# Altium PCB PCB1.PcbDoc (part 3 of 3)
Units mm, origin at the board's own origin, x right, y up, seen from the top; angles counter-clockwise.
Board outline 200 x 55 mm, 4 copper layers (Top Layer, Power Layer, GND Layer, Bottom Layer), stack 1.714 mm thick; 398 components, 267 nets, 1326 pads, 588 vias.
Unrouted connection lines stored in the file: 81.
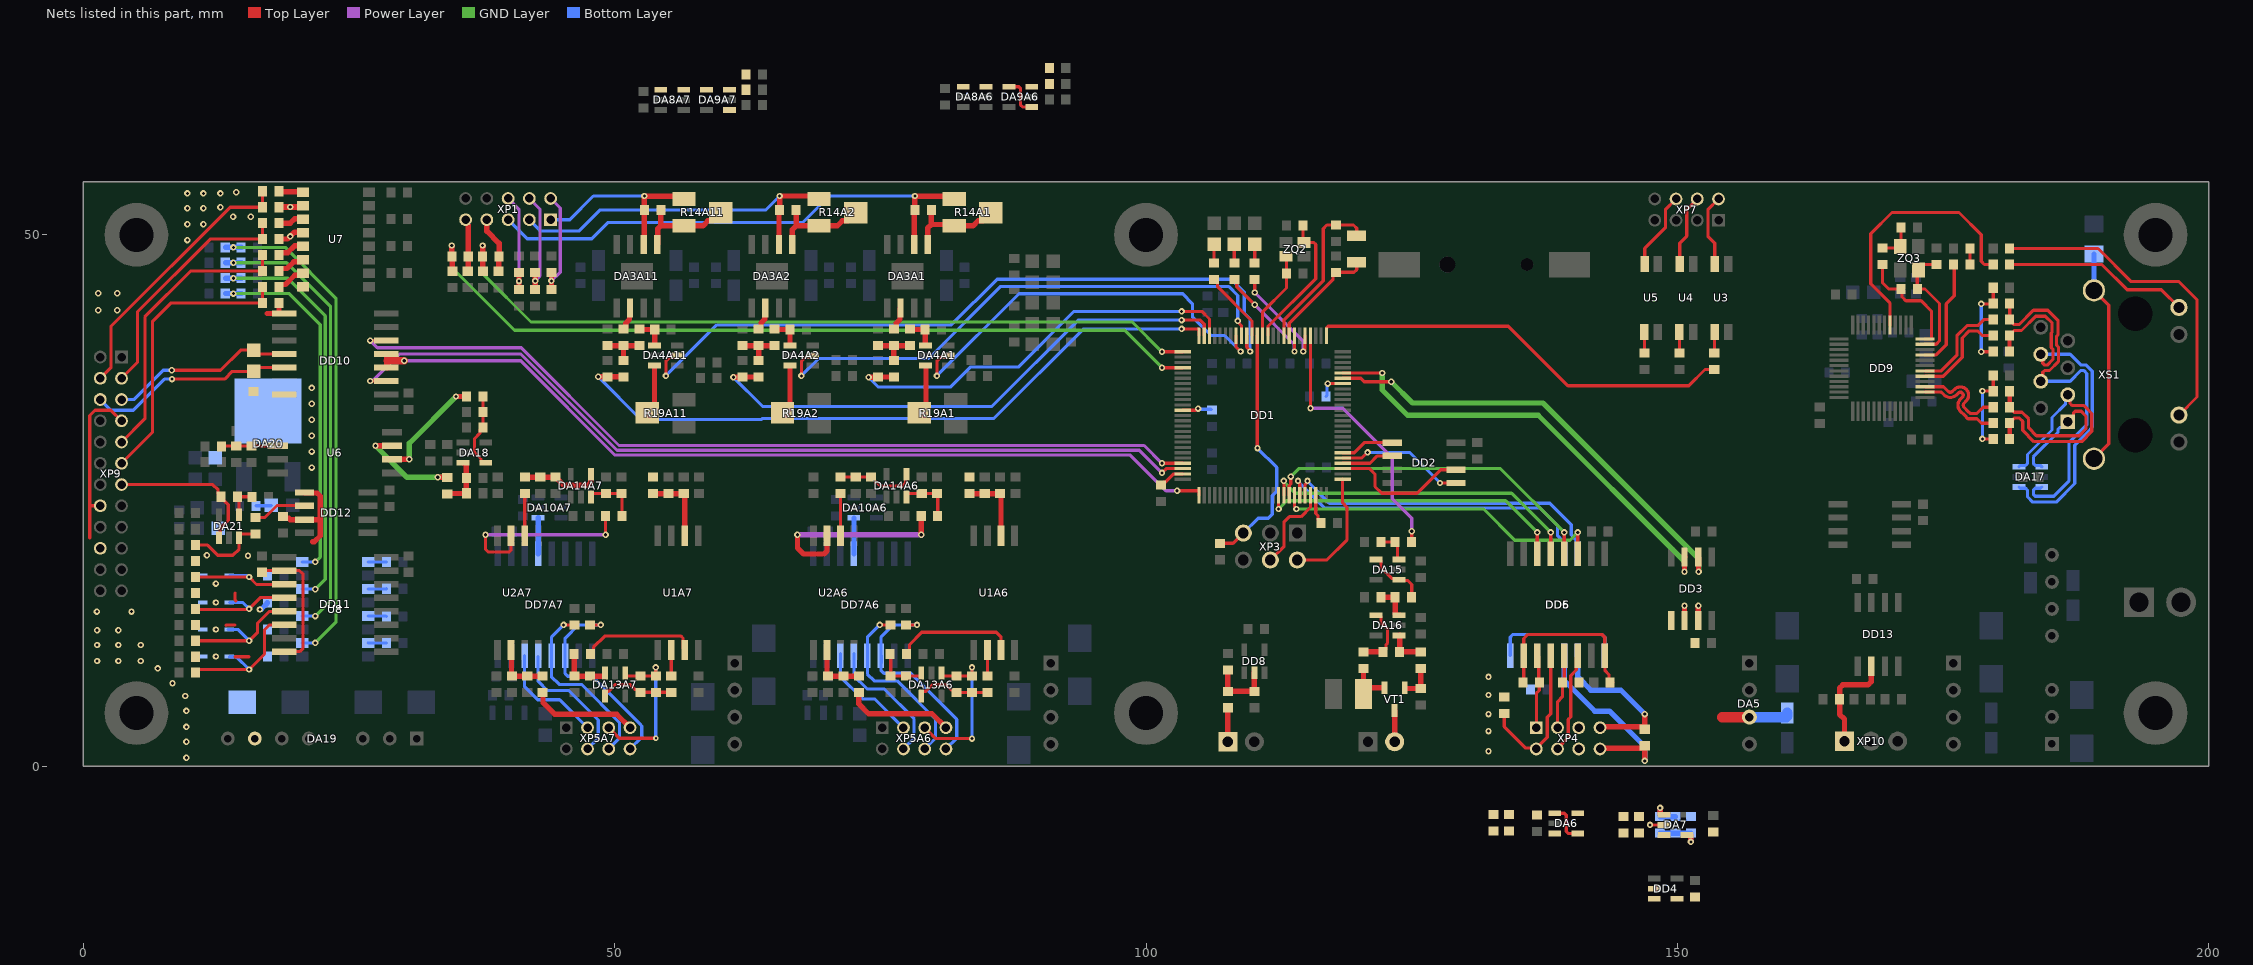
[diagram p5: the nets of this part, all layers, seen from the top]

## Via types
v1: diameter 0.6, hole 0.3, Top Layer to Bottom Layer, tented both sides, 547 vias
v2: diameter 0.6, hole 0.3, Top Layer to Bottom Layer, 36 vias
v3: diameter 0.8, hole 0.4, Top Layer to Bottom Layer, tented both sides, 4 vias
v4: diameter 0.5, hole 0.2, Top Layer to Bottom Layer, tented both sides, 1 vias

## Nets (pads, with @x,y where several pads share a name; then routed paths per layer and width w, separated by ;. In a path a pad name is that pad's centre, name@x,y a point inside that pad or via, vN(x,y) a via of type N, cw(c..) or ccw(c..) an arc to the next point about the centre after c; other vN are vias at no path point) (continued)
GND_HW: C95.2 C96.2 C105.1 C106.2 C107.2 C108.2 DA19.7 DA20.2 DD10.9 DD10.15 DD11.2 DD11.8 DD12.5 DD12.7 R73.1 R74.1 R76.1 R77.1 R79.1 R80.1 R81.1 R83.1 R114.1 R116.1 R117.1 R118.1 R120.1 R121.1 U7.2 U7.4 U7.6 U7.8 VD4.2 VD5.2 VD6.2 VD7.2 XP9.7 XP9.16 XP9.20 | length 57
  Top Layer w0.3: 0.6,21.5 0.6,24.5 ; XP9.16@1.6,24.5 0.6,24.5 ; XP9.7@3.6,32.5 2.6,33.5 1.1,33.5 0.6,33 0.6,24.5 ; 13.444,13.27 13.474,13.3 14.275,13.3 ; 14.275,10.3 15.6,10.3 ; 14.275,16.3 14.288,16.287 14.288,15.627 14.345,15.57 ; C96.2@16.764,18.4 DD11.2@18.9,18.4 20.344,18.4 20.68,18.064 20.68,11.109 20.351,10.78 DD11.8@18.9,10.78 ; R73.1@18.404,52.621 18.534,52.75 U7.2@20.68,52.75 U7.2@20.53,52.6
  Top Layer w0.5: 17.3,42.6 DD10.9@18.475,42.6 ; R81.1@18.425,43.6 18.425,42.65 DD10.9@18.475,42.6 ; R79.1@18.425,46.6 18.425,46.65 18.6,46.825 19.171,46.825 19.811,47.465 20.475,47.465 U7.6@20.68,47.67 ; R76.1@18.425,49.6 19.223,49.6 19.88,50.257 20.633,50.257 U7.4@20.68,50.21 ; R73.1@18.425,52.6 U7.2@20.53,52.6 ; C106.2@18.8,23.5 18.975,23.325 19.328,23.325 19.453,23.2 DD12.7@20.8,23.2 22.3,23.2 ; DD10.9@19,42.6 DD10.9@18.475,42.6 ; DD12.5@20.8,25.75 20.85,25.7 22.007,25.7 22.3,25.407 22.3,23.2 ; 21.582,21.125 21.741,21.125 22.3,21.684 22.3,23.2
  Bottom Layer w0.3: C107.2@16.25,24.5 17.665,24.5 C105.1@17.7,24.535
  Bottom Layer w0.5: v1(16.621,14.75) 16.64,14.769 16.744,14.769 17.325,15.35 R118.1@17.325,15.4
  other v1: 9.7,0.8 9.7,2.3 9.7,3.7 9.7,5.2 9.6,6.6 8.4,7.8 7,9.2 1.3,9.9 3.3,9.9 5.4,9.9 12.475,10.32 1.3,11.4 3.3,11.4 5.4,11.4 1.3,12.8 3.3,12.8 12.475,12.86 1.283,14.55 4.537,14.55 12.475,15.4 12.477,17.179 15.5,19.8 11.632,19.845 21.5,28.1 21.5,29.6 21.5,31.1 21.5,32.6 21.5,34.1 21.5,35.6 1.4,42.9 3.2,42.9 1.4,44.5 3.2,44.5 9.8,49.5 19.475,49.85 9.8,51 11.3,51 14.1,51.7 15.75,51.7 9.8,52.5 11.3,52.5 12.9,52.6 19.475,52.625 9.8,53.9 11.3,53.9 12.9,53.9 14.4,54
GND_PS: C37.2 C40.2 C41.2 C42.2 C43.2 C44.2 C45.2 C46.2 DA5.3 DA6.5 DA7.2 DD3.5 DD4.3 DD5.2 DD5.8 DD6.9 DD6.16 R24.1 R27.1 R28.2 R29.1 XP4.6 | length 36.7
  Top Layer w0.3: R24.1@135.456,7.875 135.551,7.971 135.551,12.013 135.938,12.4 142.899,12.4 143.171,12.128 DD5.8@143.171,10.41 143.199,10.382 143.199,8.985 143.556,8.628 C44.2@143.556,8.325 ; C44.2@143.656,8.15 C44.2@143.931,7.875 ; v1(147.425,-5.525) DA7.2@148.753,-5.525
  Top Layer w1: 154.241,4.62 DA5.3@156.781,4.62
  Bottom Layer w0.3: DD6.16@134.281,10.41 134.281,12.15 134.531,12.4 142.899,12.4 143.171,12.128 DD6.9@143.171,10.41
  Bottom Layer w1: DA5.3@156.781,4.62 160.25,4.62 160.35,4.72 C43.2@160.35,5
  other v1: 132.231,1.4 132.231,3.3 132.231,4.9 132.231,6.7 132.231,8.4
GUIDE_LAS: DD1.4 R46.1 | length 25.2
  Top Layer w0.3: v1(115.475,33.675) DD1.4@115.475,40.525 ; R46.1@125,21.1 v1(125,22.1)
  Power Layer w0.3: v1(115.475,33.675) 118.525,33.675 123.171,29.029 123.171,25.154 125,23.325 v1(125,22.1)
IL1_HW: R73.2 R87.1 XP9.4 | length 25.8
  Top Layer w0.3: XP9.4@1.6,36.5 2.6,37.5 2.6,41.376 13.824,52.6 R73.2@16.949,52.6 ; R73.2@16.875,52.6 R87.1@16.875,54.1
IL2_HW: R76.2 R88.1 XP9.3 | length 23
  Top Layer w0.3: XP9.3@3.6,36.5 5.1,38 5.1,42.77 11.93,49.6 R76.2@16.875,49.6 R88.1@16.875,51.1
KEY_HW: R79.2 R89.1 XP9.9 | length 27
  Top Layer w0.3: XP9.9@3.6,30.5 5.8,32.7 5.8,42.279 10.121,46.6 R79.2@16.85,46.6 ; R79.2@16.875,46.6 R89.1@16.875,48.1
LED1: DD1.15 R11.1 | length 6.8
  Top Layer w0.3: R11.1@106.4,45.8 106.443,45.8 106.718,45.525 106.718,45.144 109.975,41.887 DD1.15@109.975,40.525
LED2: DD1.7 R12.1 | length 10.6
  Top Layer w0.3: R12.1@108.31,45.8 108.548,45.562 108.548,45.102 v1(110.225,43.425) ; v1(113.975,39.025) DD1.7@113.975,40.525
  Power Layer w0.3: v1(110.225,43.425) 113.918,39.732 113.918,39.082 v1(113.975,39.025)
LED3: DD1.5 R13.1 | length 10.2
  Top Layer w0.3: v1(110.225,44.575) R13.1@110.225,45.8 ; v1(114.8,39.025) 114.8,39.106 114.975,39.281 DD1.5@114.975,40.525
  Power Layer w0.3: v1(110.225,44.575) 114.8,40 v1(114.8,39.025)
LNKn: DD9.17 R67.2 | length 25.2
  Top Layer w0.3: DD9.17@170,41.5 170,43.6 168.2,45.4 168.2,50.1 170.2,52.1 176.5,52.1 178.6,50 178.6,47.5 178.888,47.212 R67.2@179.725,47.212
MEM_CS: DD1.81 DD2.1 | length 5.1
  Top Layer w0.3: DD1.81@118.5,29.5 119.6,29.5 120.546,30.446 DD2.1@123.171,30.446
MEM_MISO: DD1.79 DD2.2 | length 5
  Top Layer w0.3: DD1.79@118.5,28.5 121.074,28.5 121.769,29.196 DD2.2@123.171,29.196
MEM_MOSI: DD1.80 DD2.5 | length 12.1
  Top Layer w0.3: DD1.80@118.5,29 120.314,29 120.839,29.525 v1(120.85,29.525) ; v1(127.671,26.646) DD2.5@129.171,26.646
  Bottom Layer w0.3: v1(120.85,29.525) 124.791,29.525 v1(127.671,26.646)
MEM_SCLK: DD1.78 DD2.6 | length 13.2
  Top Layer w0.3: DD1.78@118.5,28 121.037,28 121.553,27.484 121.553,26.306 122.17,25.688 125.513,25.688 127.721,27.896 DD2.6@129.171,27.896
MP_EN_HW: R81.2 R90.1 XP9.11 | length 27.1
  Top Layer w0.3: XP9.11@3.6,28.5 6.5,31.4 6.5,41.83 8.27,43.6 R81.2@16.8,43.6 ; R81.2@16.875,43.6 R90.1@16.875,45.1
NetC14_1: C14.1 DD1.49 | length 2.5
  Top Layer w0.3: C14.1@101.4,26.45 101.675,26.725 101.826,26.725 102.601,27.5 DD1.49@103.45,27.5
NetC16_1: C16.1 DD1.73 | length 2.8
  Top Layer w0.3: DD1.73@115.975,25.475 115.975,23.777 116.183,23.569 116.183,23.167 C16.1@116.45,22.9
NetC25A1_1: C25A1.1 DA3A1.1 R14A1.2 R14A1.3 | length 9.5
  Top Layer w0.5: DA3A1.1@79.45,49.105 79.45,50.63 79.8,50.98 ; C25A1.1@79.8,52.325 79.8,50.98 ; R14A1.2@85.4,52.075 84.65,51.325 84.185,51.325 83.71,50.85 R14A1.3@81.95,50.85 81.82,50.98 79.8,50.98
NetC25A2_1: C25A2.1 DA3A2.1 R14A2.2 R14A2.3 | length 9.5
  Top Layer w0.5: DA3A2.1@66.716,49.105 66.724,49.113 66.724,50.499 67.075,50.85 ; C25A2.1@67.075,52.325 67.075,50.85 ; R14A2.2@72.675,52.075 71.925,51.325 71.425,51.325 70.959,50.859 69.234,50.859 R14A2.3@69.225,50.85 67.075,50.85
NetC25A11_1: C25A11.1 DA3A11.1 R14A11.2 R14A11.3 | length 9.5
  Top Layer w0.5: DA3A11.1@54,49.105 54.05,49.155 54.05,50.575 54.12,50.645 54.19,50.715 54.35,50.875 ; C25A11.1@54.35,52.325 54.35,50.875 ; R14A11.2@59.975,52.075 59.225,51.325 58.775,51.325 58.3,50.85 R14A11.3@56.525,50.85 54.35,50.85 54.35,50.875
NetC31A1_1: C31A1.1 DA4A1.1 R18A1.2 | length 3.1
  Top Layer w0.5: R18A1.2@77.775,41.125 77.8,41.1 79.2,41.1 C31A1.1@79.225,41.075 79.225,39.625 DA4A1.1@79.25,39.6 DA4A1.1@79.4,39.6
NetC31A2_1: C31A2.1 DA4A2.1 R18A2.2 | length 3.1
  Top Layer w0.5: R18A2.2@65.05,41.125 65.075,41.1 66.475,41.1 C31A2.1@66.5,41.075 66.5,39.625 66.525,39.6 DA4A2.1@66.65,39.6
NetC31A11_1: C31A11.1 DA4A11.1 R18A11.2 | length 3
  Top Layer w0.5: R18A11.2@52.325,41.125 52.35,41.1 C31A11.1@53.9,41.1 ; DA4A11.1@53.775,39.625 C31A11.1@53.775,41.075
NetC40_1: C40.1 DA6.3 R22.2
NetC47_1: C47.1 DA7.4 R26.1 R30.2 | length 4.7
  Top Layer w0.5: DA7.4@150.903,-6.475 151.228,-6.475 151.253,-6.5 151.253,-6.825 151.256,-6.828 151.256,-7.106 v1(151.275,-7.125)
  Bottom Layer w0.5: C47.1@148.375,-6.3 R30.2@149.825,-6.3 R26.1@151.275,-6.3 v1(151.275,-7.125)
NetC47_2: C47.2 DA7.1 R30.1 XP4.5 | length 3.3
  Top Layer w0.5: v1(148.375,-3.925) 148.375,-3.952 148.403,-3.98 148.403,-4.55 148.428,-4.575 DA7.1@148.753,-4.575
  Bottom Layer w0.5: v1(148.375,-3.925) C47.2@148.375,-4.75 R30.1@149.825,-4.75
NetC48A6_1: C48A6.1 DA9A6.3 R31A6.2
NetC48A7_1: C48A7.1 DA9A7.3 R31A7.2
NetC56A6_2: C56A6.2 R32A6.1 R34A6.1 U1A6.2 | length 6.9
  Top Layer w0.5: R32A6.1@83.375,25.65 86.3,25.65 86.35,25.6 U1A6.2@86.35,21.675
NetC56A7_2: C56A7.2 R32A7.1 R34A7.1 U1A7.2 | length 6.9
  Top Layer w0.5: R32A7.1@53.609,25.638 55.059,25.638 56.509,25.638 56.6,25.547 U1A7.2@56.6,21.675
NetC57A6_2: C57A6.2 R33A6.1 R35A6.1 U2A6.2 | length 5.5
  Top Layer w0.5: U2A6.2@69.975,11.1 69.975,8.475 71.425,8.475 R33A6.1@72.875,8.475
NetC57A7_2: C57A7.2 R33A7.1 R35A7.1 U2A7.2 | length 5.4
  Top Layer w0.5: U2A7.2@40.26,10.925 40.293,10.893 40.293,8.507 C57A7.2@40.325,8.475 R33A7.1@43.225,8.475
NetC63A6_1: C63A6.1 DA13A6.3 R36A6.2 R40A6.2 | length 5.2
  Top Layer w0.3: R36A6.2@75.925,10.575 75.975,10.525 C63A6.1@75.975,8.475 R40A6.2@77.425,8.475 78.725,8.475 78.85,8.6 DA13A6.3@78.85,8.76
NetC63A7_1: C63A7.1 DA13A7.3 R36A7.2 R40A7.2 | length 5.3
  Top Layer w0.5: R36A7.2@46.175,10.575 46.2,10.55 46.2,8.5 C63A7.1@46.225,8.475 R40A7.2@47.675,8.475 49.075,8.475 49.1,8.5 DA13A7.3@49.1,8.76
NetC64A6_1: C64A6.1 DA14A6.3 R37A6.2 R41A6.1 | length 5.2
  Top Layer w0.3: DA14A6.3@77.475,25.325 77.475,25.525 77.6,25.65 R41A6.1@78.9,25.65 C64A6.1@80.35,25.65 80.4,25.6 R37A6.2@80.4,23.55
NetC64A7_1: C64A7.1 DA14A7.3 R37A7.2 R41A7.1 | length 5.2
  Top Layer w0.3: DA14A7.3@47.775,25.325 47.775,25.525 47.9,25.65 R41A7.1@49.2,25.65 C64A7.1@50.65,25.65 50.7,25.6 R37A7.2@50.7,23.55
NetC68A6_1: C68A6.1 DA13A6.4 R38A6.2 R44A6.1 | length 7.2
  Top Layer w0.3: DA13A6.4@78.85,6.61 78.85,6.935 78.975,7.06 79.3,7.06 79.93,7.69 81.171,7.69 81.661,7.2 81.9,7.2 R44A6.1@82.175,6.925 C68A6.1@83.625,6.925 R38A6.2@85.075,6.925
NetC68A6_2: C68A6.2 DA13A6.1 R44A6.2 XP5A6.5 | length 15.5
  Top Layer w0.3: XP5A6.5@79.175,3.625 80.2,2.6 v1(83.625,2.6) ; DA13A6.1@80.75,8.76 80.75,8.6 80.875,8.475 R44A6.2@82.175,8.475 C68A6.2@83.625,8.475 v1(83.625,9.3)
  Bottom Layer w0.3: v1(83.625,2.6) v1(83.625,9.3)
NetC68A7_1: C68A7.1 DA13A7.4 R38A7.2 R44A7.1 | length 7.2
  Top Layer w0.3: DA13A7.4@49.1,6.61 49.1,6.935 49.225,7.06 49.435,7.06 50.075,7.7 51.419,7.7 51.894,7.225 52.15,7.225 52.425,6.95 53.875,6.95 R38A7.2@55.325,6.95
NetC68A7_2: C68A7.2 DA13A7.1 R44A7.2 XP5A7.5 | length 15.4
  Top Layer w0.3: XP5A7.5@49.45,3.625 50.45,2.625 v4(53.875,2.625) ; DA13A7.1@51,8.76 51,8.625 51.125,8.5 52.425,8.5 53.875,8.5 v1(53.875,9.3)
  Bottom Layer w0.3: v4(53.875,2.625) v1(53.875,9.3)
NetC69A6_1: C69A6.1 DA14A6.4 R39A6.2 R45A6.2 | length 7.5
  Top Layer w0.3: R39A6.2@71.241,27.2 C69A6.1@72.691,27.2 74.191,27.2 74.466,26.925 74.466,26.875 74.972,26.369 77.069,26.369 77.369,26.669 77.369,27.369 DA14A6.4@77.475,27.475
NetC69A7_1: C69A7.1 DA14A7.4 R39A7.2 R45A7.2 | length 7.5
  Top Layer w0.5: R39A7.2@41.548,27.188 C69A7.1@42.998,27.188 ; C69A7.1@43.01,27.2 R45A7.2@44.5,27.2 ; R45A7.2@44.45,27.2 R45A7.2@44.5,27.2 ; DA14A7.4@47.775,27.475 47.75,27.45 47.75,26.718 47.457,26.425 45.225,26.425 44.675,26.975 44.675,27.025 R45A7.2@44.5,27.2
NetC70_1: C70.1 DA15.3 R46.2 | length 3.1
  Top Layer w0.3: C70.1@122.1,21.1 R46.2@123.45,21.1 123.675,20.875 DA15.3@123.675,19.45
NetC73_1: C73.1 DA16.1 R49.1 | length 3.5
  Top Layer w0.5: DA16.1@123.871,12.307 C73.1@123.871,10.757 R49.1@125.871,10.757
NetC73_2: C73.2 DA16.4 R50.1 | length 6.1
  Top Layer w0.3: DA16.4@121.65,14.207 121.975,14.207 122.1,14.082 122.1,13.907 122.1,13.5 122.731,12.869 122.731,11.583 122.596,11.447 122.596,11.032 C73.2@122.321,10.757
  Top Layer w0.5: R50.1@120.471,10.757 C73.2@122.321,10.757
NetC74_1: C74.1 DD8.2 R56.2 R57.1 | length 6.3
  Top Layer w0.5: R57.1@107.7,9.05 R56.2@107.7,7.05 C74.1@110.2,7.05 DD8.2@110.2,8.8
NetC77_1: C77.1 XS1.13 XS1.14 | length 20.4
  Top Layer w0.3: XS1.13@189.2,28.932 190.6,30.332 190.6,43.372 XS1.14@189.2,44.772
  Bottom Layer w0.5: XS1.14@189.2,44.772 C77.1@189.2,48.2
NetC79_1: C79.1 R58.2 R59.2 | length 8.1
  Top Layer w0.3: v1(178.7,30.8) 179.703,30.8 R58.2@179.725,30.778 ; v1(178.7,35.3) 179.703,35.3 R59.2@179.725,35.278 C79.1@179.725,36.778
  Bottom Layer w0.3: v1(178.7,30.8) v1(178.7,35.3)
NetC80_1: C80.1 R60.2 R61.2 | length 8.3
  Top Layer w0.3: v1(178.6,39) 179.7,39 R60.2@179.725,39.025 ; v1(178.6,43.5) 179.7,43.5 R61.2@179.725,43.525 C80.1@179.725,45.025
  Bottom Layer w0.3: v1(178.6,39) v1(178.6,43.5)
NetC84_1: C84.1 R71.2 ZQ3.3 | length 3.6
  Top Layer w0.3: R71.2@169.3,48.75 170.825,48.75 ZQ3.3@170.975,48.9 171.05,48.975 C84.1@171.05,50.7
NetC94_2: C94.2 R78.1 R82.1 U6.2 | length 5.4
  Top Layer w0.3: R78.1@12.991,30.075 13.041,30.125 R82.1@14.341,30.125 ; R82.1@14.391,30.125 C94.2@15.841,30.125 18.35,30.125 U6.2@18.4,30.175
NetC99_1: C99.1 DA18.3 R95.2 R99.1 | length 5
  Top Layer w0.5: R95.2@34.25,25.632 34.275,25.657 36.025,25.657 C99.1@36.05,25.682 R99.1@36.05,27.132 36.05,28.532 36.025,28.557 DA18.3@35.725,28.557
NetC102_1: C102.1 DA18.4 R98.2 R100.2 | length 7.2
  Top Layer w0.3: R98.2@37.6,34.782 C102.1@37.6,33.332 R100.2@37.6,31.882 37.325,31.607 37.325,31.316 36.8,30.791 36.8,29.532 37.425,28.907 37.425,28.682 37.55,28.557 DA18.4@37.875,28.557
NetC109_1: C109.1 DA21.3 R105.2 | length 7.4
  Top Layer w0.3: C109.1@10.575,20.8 11.7,20.8 12.65,19.85 14.075,19.85 14.658,20.433 DA21.3@14.658,21.5 ; DA21.3@14.658,21.725 14.783,21.85 R105.2@16.2,21.85
NetDA3A1_6: DA3A1.6 R15A1.1 | length 2.2
  Top Layer w0.5: R15A1.1@76.358,41.158 76.5,41.3 76.5,41.701 76.85,42.051 76.85,43.055 DA3A1.6@76.9,43.105
NetDA3A2_6: DA3A2.6 R15A2.1 | length 2.3
  Top Layer w0.5: R15A2.1@63.55,41.125 63.725,41.3 63.775,41.3 63.775,41.701 64.116,42.042 64.116,43.056 DA3A2.6@64.166,43.106
NetDA3A11_6: DA3A11.6 R15A11.1 | length 2.3
  Top Layer w0.5: R15A11.1@50.825,41.125 50.875,41.125 51.05,41.3 51.05,41.687 51.4,42.037 51.4,43.055 DA3A11.6@51.45,43.105
NetDA4A1_3: DA4A1.3 R19A1.2 | length 4.1
  Top Layer w0.5: R19A1.2@79,33.675 79.3,33.975 DA4A1.3@79.3,37.7
NetDA4A2_3: DA4A2.3 R19A2.2 | length 4.8
  Top Layer w0.5: R19A2.2@65.836,33.186 66.5,33.85 DA4A2.3@66.5,37.7
NetDA4A11_3: DA4A11.3 R19A11.2 | length 4.8
  Top Layer w0.5: R19A11.2@53.075,33.25 53.175,33.25 53.75,33.825 DA4A11.3@53.75,37.7
NetDA6_1: DA6.1 DA6.4 R23.2 | length 3.8
  Top Layer w0.3: DA6.1@138.474,-4.424 139.374,-4.424 139.55,-4.6 139.55,-6.149 139.726,-6.324 DA6.4@140.624,-6.324
NetDA7_3: DA7.3 R23.1 R28.1
NetDA8A6_3: DA8A6.3 DA9A6.1 DA9A6.4 | length 3.8
  Top Layer w0.3: DA9A6.4@87.1,63.934 88.024,63.934 88.2,63.758 88.2,62.21 88.376,62.034 DA9A6.1@89.25,62.034
NetDA8A6_4: DA8A6.4 R32A6.2
NetDA8A7_3: DA8A7.3 DA9A7.1 DA9A7.4
NetDA8A7_4: DA8A7.4 R32A7.2
NetDA10A6_4: DA10A6.4 DD7A6.4 | length 3.4
  Bottom Layer w0.5: DD7A6.4@72.515,20 DA10A6.4@72.515,23.36
NetDA10A7_4: DA10A7.4 DD7A7.4 | length 3.4
  Bottom Layer w0.5: DD7A7.4@42.8,20 DA10A7.4@42.8,23.375
NetDA15_1: DA15.1 DA15.4 R47.1 | length 5.9
  Top Layer w0.3: DA15.4@121.65,19.45 121.975,19.45 122.1,19.325 122.1,18.7 123.125,17.675 123.675,17.675 123.881,17.469 124.631,17.469 125,17.1 R47.1@125,15.9
NetDA16_3: DA16.3 R47.2 R48.1 | length 3.4
  Top Layer w0.5: R48.1@122.1,15.9 R47.2@123.45,15.9 123.45,14.332 123.575,14.207 DA16.3@123.871,14.207
NetDA21_4: DA21.4 R115.2 R119.1 | length 3.2
  Top Layer w0.3: DA21.4@14.658,23.65 14.658,25.197 R119.1@14.505,25.35 15.949,25.35 R115.2@15.966,25.333
NetDD1_37: DD1.37 R9.1 | length 2.8
  Top Layer w0.3: DD1.37@103.45,33.5 104.694,33.5 104.844,33.65 v1@104.925,33.65
  Bottom Layer w0.3: v1@104.925,33.65 104.982,33.593 106.098,33.593 R9.1@106.134,33.556
  other v1: 104.9,33.65
NetDD1_94: DD1.94 R10.1 | length 2.7
  Top Layer w0.3: v1(117.1,36) 117.875,36 DD1.94@118.5,36
  Bottom Layer w0.3: R10.1@116.95,34.8 117.025,34.875 117.025,35.925 v1(117.1,36)
NetDD3_6: DD3.6 R22.1 | length 1.4
  Top Layer w0.5: DD3.6@150.675,13.7 v1(150.675,15.1)
NetDD3_7: DD3.7 DD4.2 | length 1.4
  Top Layer w0.5: DD3.7@151.975,13.7 v1(151.975,15.1)
NetDD4_4: DD4.4 R26.2
NetDD5_3: DD5.3 R24.2 XP4.1 | length 6.9
  Top Layer w0.3: XP4.1@136.731,3.7 136.731,6.85 137.006,7.124 R24.2@137.006,7.875 136.959,7.922 136.959,10.272 DD5.3@136.821,10.41
NetDD5_4: DD5.4 R27.2 XP4.2 | length 14.4
  Top Layer w0.3: R27.2@133.706,4.95 133.706,3.725 135.731,1.7 136.731,1.7 137.755,2.724 137.755,4.599 138.091,4.935 DD5.4@138.091,10.41
NetDD5_5: DD5.5 R29.2 XP4.3 | length 7
  Top Layer w0.3: XP4.3@138.731,3.7 138.731,6.075 139.181,6.525 R29.2@139.181,7.875 139.361,8.055 DD5.5@139.361,10.41
NetDD5_6: DD5.6 XP4.4 | length 9.5
  Top Layer w0.3: XP4.4@138.731,1.7 139.731,2.7 139.731,4.4 139.96,4.629 139.96,8.527 140.481,9.049 140.481,10.26 DD5.6@140.631,10.41
NetDD6_11: DD6.11 R25.1 XP4.7 | length 15.2
  Top Layer w0.5: XP4.7@142.731,3.7 146.931,3.7 v1(146.931,4.9)
  Bottom Layer w0.5: DD6.11@140.631,10.41 140.631,8.375 141.856,7.15 144.681,7.15 v1(146.931,4.9)
NetDD6_12: DD6.12 R25.2 XP4.8 | length 19.3
  Top Layer w0.5: XP4.8@142.731,1.7 146.931,1.7 v1(146.931,0.5)
  Bottom Layer w0.5: DD6.12@139.361,10.41 139.361,8.043 142.23,5.175 143.617,5.175 146.931,1.861 v1(146.931,0.5)
NetDD7A6_11: DD7A6.11 R42A6.1 XP5A6.8 | length 20.3
  Top Layer w0.3: R42A6.1@77.425,13.3 v1(78.45,13.3)
  Bottom Layer w0.3: DD7A6.11@75.055,9.727 75.055,9.025 75.341,8.74 77.86,8.74 82.197,4.403 82.197,2.647 XP5A6.8@81.175,1.625 ; DD7A6.11@75.055,10.4 75.055,12.122 76.233,13.3 v1(78.45,13.3) ; DD7A6.11@75.085,9.727 DD7A6.11@75.085,10.4
NetDD7A6_12: DD7A6.12 R43A6.1 XP5A6.6 | length 17.5
  Top Layer w0.3: v1(74.95,13.3) R43A6.1@75.975,13.3
  Bottom Layer w0.3: v1(74.95,13.3) 73.785,12.135 DD7A6.12@73.785,10.4 73.785,8.665 74.425,8.025 76.575,8.025 80.188,4.412 80.188,2.638 XP5A6.6@79.175,1.625
NetDD7A6_13: DD7A6.13 XP5A6.4 | length 12.7
  Bottom Layer w0.3: DD7A6.13@72.515,10.6 72.515,8.51 73.75,7.275 75.35,7.275 78.175,4.45 78.175,2.625 XP5A6.4@77.175,1.625
NetDD7A6_14: DD7A6.14 XP5A6.3 | length 10.1
  Bottom Layer w0.3: DD7A6.14@71.245,10.6 71.245,8.422 73.342,6.325 74.475,6.325 XP5A6.3@77.175,3.625
NetDD7A7_11: DD7A7.11 R42A7.1 XP5A7.8 | length 20.1
  Top Layer w0.3: R42A7.1@47.675,13.3 v1(48.7,13.3)
  Bottom Layer w0.3: v1(48.7,13.3) 46.599,13.3 45.34,12.041 45.34,8.71 45.594,8.456 47.892,8.456 52.35,3.998 52.35,3.981 52.55,3.781 52.55,2.725 XP5A7.8@51.45,1.625
NetDD7A7_12: DD7A7.12 R43A7.1 XP5A7.6 | length 17.5
  Top Layer w0.3: v1(45.2,13.3) R43A7.1@46.225,13.3
  Bottom Layer w0.3: v1(45.2,13.3) 44.07,12.17 44.07,10.42 44.05,10.4 44.05,8.425 44.775,7.7 46.883,7.7 50.45,4.133 50.45,2.625 XP5A7.6@49.45,1.625
NetDD7A7_13: DD7A7.13 XP5A7.4 | length 12.6
  Bottom Layer w0.3: DD7A7.13@42.801,10.299 42.801,7.999 43.675,7.125 45.675,7.125 48.45,4.35 48.45,2.625 XP5A7.4@47.45,1.625
NetDD7A7_14: DD7A7.14 XP5A7.3 | length 10.4
  Bottom Layer w0.3: DD7A7.14@41.53,10.4 41.53,7.47 42.75,6.25 44.825,6.25 XP5A7.3@47.45,3.625
NetDD9_9: DD9.9 R70.2 | length 10.2
  Top Layer w0.3: DD9.9@173.3,38.7 174.05,38.7 174.345,38.7 175.3,39.655 175.3,43.5 176.051,44.251 R70.2@176.051,47.126
NetDD11_3: DD11.3 R91.2 VD7.1 | length 11
  Top Layer w0.3: R91.2@10.575,17.8 13.875,17.8 v1(15.6,17.8) 16.3,17.1 18.87,17.1 DD11.3@18.9,17.13 DD11.3@19.4,17.13
  Bottom Layer w0.3: VD7.1@13.75,17.94 15.379,17.94 15.519,17.8 v1(15.6,17.8)
NetDD11_4: DD11.4 R85.2 VD6.1 | length 10.9
  Top Layer w0.3: R85.2@10.575,14.8 10.643,14.732 15.45,14.732 15.519,14.8 v1(15.6,14.8) 16.66,15.86 DD11.4@18.9,15.86
  Bottom Layer w0.3: VD6.1@13.75,15.4 15,15.4 v1(15.6,14.8)
NetDD11_5: DD11.5 R92.2 VD5.1 | length 12.4
  Top Layer w0.3: R92.2@10.575,11.8 v1(15.6,11.8) 16.4,12.6 16.4,13.47 17.476,14.546 18.856,14.546 DD11.5@18.9,14.59
  Bottom Layer w0.3: VD5.1@13.612,12.872 14.534,12.872 v1@15.603,11.803
NetDD11_6: DD11.6 R86.2 VD4.1 | length 13.9
  Top Layer w0.3: R86.2@10.575,8.8 10.575,8.825 10.85,9.1 v1(15.6,9.1) 17.05,10.55 17.05,12.85 17.476,13.276 18.856,13.276 DD11.6@18.9,13.32
  Bottom Layer w0.3: VD4.1@13.75,10.3 13.758,10.292 14.408,10.292 v1(15.6,9.1)
NetDD12_6: DD12.6 R105.1 | length 5.1
  Top Layer w0.3: R105.1@16.2,23.4 17.09,23.4 18.225,24.535 20.765,24.535 DD12.6@20.8,24.5
NetDD13_2: DD13.2 R122.1 XP10.1 | length 9.9
  Top Layer w0.5: XP10.1@165.725,2.35 165.725,4.425 165.275,4.875 165.275,7.357 165.568,7.65 167.946,7.65 168.239,7.943 DD13.2@168.239,9.4
NetR1_1: R1.1 R2.2 XP1.6 | length 9.8
  Top Layer w0.5: R2.2@41,44.85 v1(41,45.65) R1.1@41,46.475
  Power Layer w0.3: XP1.6@39.975,53.425 40.986,52.414 v1@40.986,45.662
NetR3_1: R3.1 R4.2 XP1.4 | length 10.1
  Top Layer w0.5: R4.2@42.525,44.85 v1(42.525,45.662) R3.1@42.525,46.475
  Power Layer w0.3: XP1.4@41.975,53.425 42.975,52.425 42.975,46.112 v1(42.525,45.662) v1@42.437,45.575
NetR5_1: R5.1 R6.2 XP1.2 | length 10.1
  Top Layer w0.5: R6.2@44.05,44.85 v1(44.05,45.662) R5.1@44.05,46.475
  Power Layer w0.3: XP1.2@43.975,53.425 44.875,52.525 44.875,46.488 v1(44.05,45.662)
NetR11_2: R11.2 VD1.1 | length 1.8
  Top Layer w0.3: R11.2@106.4,47.35 VD1.1@106.4,49.1
NetR12_2: R12.2 VD2.1 | length 1.7
  Top Layer w0.3: R12.2@108.31,47.35 VD2.1@108.31,49.1
NetR13_2: R13.2 VD3.1 | length 1.8
  Top Layer w0.3: R13.2@110.225,47.31 VD3.1@110.225,49.11
NetR15A1_2: R15A1.2 R16A1.1 R17A1.1 R18A1.1 | length 4.3
  Top Layer w0.5: R16A1.1@74.775,39.575 R15A1.2@76.275,39.575 R18A1.1@77.775,39.575 ; R17A1.1@76.275,38.175 R15A1.2@76.275,39.48
NetR15A2_2: R15A2.2 R16A2.1 R17A2.1 R18A2.1 | length 4.4
  Top Layer w0.5: R16A2.1@62.05,39.575 R15A2.2@63.525,39.575 ; R17A2.1@63.55,38.175 R15A2.2@63.55,39.575 R18A2.1@65.05,39.575
NetR15A11_2: R15A11.2 R16A11.1 R17A11.1 R18A11.1 | length 4.6
  Top Layer w0.5: R16A11.1@49.325,39.575 R15A11.2@50.825,39.575 R18A11.1@52.325,39.575 ; R17A11.1@50.825,38.175 50.825,39.525 R15A11.2@51,39.7
NetR33A6_2: R33A6.2 XP5A6.7 | length 10.2
  Top Layer w0.5: R33A6.2@72.975,6.925 72.975,5.85 73.89,4.935 79.865,4.935 XP5A6.7@81.175,3.625
NetR33A7_2: R33A7.2 XP5A7.7 | length 10.1
  Top Layer w0.5: R33A7.2@43.225,6.925 43.225,6.791 43.266,6.75 43.266,5.984 44.375,4.875 50.2,4.875 XP5A7.7@51.45,3.625
NetR36A6_1: R36A6.1 U1A6.7 | length 11.3
  Top Layer w0.3: R36A6.1@77.475,10.575 77.75,10.85 77.75,11.445 78.905,12.6 85.925,12.6 86.35,12.175 U1A6.7@86.35,11.1
NetR36A7_1: R36A7.1 U1A7.7 | length 10.9
  Top Layer w0.3: R36A7.1@47.725,10.575 48,10.85 48,11.179 49.064,12.243 56.258,12.243 56.433,12.067 56.433,11.092 U1A7.7@56.6,10.925
NetR37A6_1: R37A6.1 U2A6.7 | length 19.2
  Top Layer w0.5: v1(67.2,21.775) 67.2,20.539 67.764,19.975 69.682,19.975 69.975,20.268 U2A6.7@69.975,21.675 ; v1(78.85,21.775) R37A6.1@78.85,23.55
  Power Layer w0.5: v1(67.2,21.775) v1(78.85,21.775)
NetR37A7_1: R37A7.1 U2A7.7 | length 18.3
  Top Layer w0.3: v1(37.85,21.775) 37.85,20.404 38.087,20.167 40.084,20.167 40.26,20.343 U2A7.7@40.26,21.675 ; v1@49.15,21.795 R37A7.1@49.15,23.55
  Power Layer w0.3: v1(37.85,21.775) v1(49.15,21.775)
NetR38A6_1: R38A6.1 U1A6.6 | length 2.6
  Top Layer w0.3: R38A6.1@85.075,8.475 U1A6.6@85.075,11.1
NetR38A7_1: R38A7.1 U1A7.6 | length 2.4
  Top Layer w0.3: R38A7.1@55.325,8.5 U1A7.6@55.325,10.925
NetR39A6_1: R39A6.1 U2A6.6 | length 4
  Top Layer w0.3: U2A6.6@71.25,21.675 R39A6.1@71.25,25.65
NetR39A7_1: R39A7.1 U2A7.6 | length 4
  Top Layer w0.3: U2A7.6@41.548,21.675 R39A7.1@41.548,25.638
NetR49_2: R49.2 R51.2 VT1.1 | length 3.5
  Top Layer w0.5: VT1.1@124.346,7.382 124.421,7.307 R51.2@125.871,7.307 ; R51.2@125.85,7.307 R49.2@125.85,9.207
NetR50_2: R50.2 R52.2 VT1.2 | length 4.6
  Top Layer w0.5: R52.2@120.446,6.782 R52.2@120.471,6.807 ; R50.2@120.471,9.207 R52.2@120.471,6.807 ; VT1.2@122.446,7.382 121.046,7.382 R52.2@120.471,6.807
NetR53_1: R53.1 U3.1 | length 2
  Top Layer w0.3: R53.1@153.475,38.875 153.475,38.95 153.5,38.975 U3.1@153.5,40.875
NetR54_1: R54.1 U4.1 | length 2
  Top Layer w0.3: R54.1@150.2,38.875 150.2,38.95 U4.1@150.2,40.875
NetR55_1: R55.1 U5.1 | length 2
  Top Layer w0.3: R55.1@146.9,38.875 146.9,38.95 U5.1@146.9,40.875
NetR56_1: R56.1 XP8.1 | length 3.2
  Top Layer w0.5: XP8.1@107.7,2.3 R56.1@107.7,5.5
NetR64_1: R64.1 XS1.10 | length 31.2
  Top Layer w0.3: R64.1@181.275,48.712 189.588,48.712 192.7,45.6 197.2,45.6 198.9,43.9 198.9,34.74 XS1.10@197.2,33.04
NetR67_1: R67.1 XS1.12 | length 17.6
  Top Layer w0.3: R67.1@181.275,47.212 189.947,47.212 192.326,44.832 195.538,44.832 XS1.12@197.2,43.17
NetR68_2: R68.2 R70.1 | length 1.5
  Top Layer w0.3: R70.1@177.525,47.212 R68.2@177.525,48.712
NetR87_2: R87.2 U7.1 | length 2.3
  Top Layer w0.3: R87.2@18.425,54.1 R87.2@18.456,54.069 ; U7.1@20.631,54.069 U7.1@20.68,54.02
  Top Layer w0.5: R87.2@18.456,54.069 U7.1@20.631,54.069
NetR88_2: R88.2 U7.3 | length 2.4
  Top Layer w0.5: R88.2@18.425,51.1 19.475,51.1 19.88,51.505 20.655,51.505 U7.3@20.68,51.48
NetR89_2: R89.2 U7.5 | length 2.7
  Top Layer w0.5: R89.2@18.425,48.1 18.425,48.15 18.6,48.325 19.239,48.325 19.88,48.966 20.654,48.966 U7.5@20.68,48.94
NetR90_2: R90.2 U7.7 | length 2.8
  Top Layer w0.5: R90.2@18.425,45.1 18.425,45.15 18.6,45.325 19.032,45.325 19.902,46.195 20.475,46.195 U7.7@20.68,46.4
NetR95_1: R95.1 U6.7 | length 9.9
  Top Layer w0.5: v1(27.5,30.15) U6.7@29.05,30.15 ; v1(33.35,27.182) R95.1@34.25,27.182
  GND Layer w0.5: v1(27.5,30.15) 30.475,27.175 33.343,27.175 v1(33.35,27.182) ; v1@33.35,27.175 33.725,27.175
NetR98_1: R98.1 U6.6 | length 10.3
  Top Layer w0.5: U6.6@29.05,28.875 v1(30.675,28.875) ; v1(35.075,34.782) 36.004,34.782 R98.1@36.027,34.759
  GND Layer w0.5: v1(30.675,28.875) 30.675,30.382 v1(35.075,34.782)
NetR101_1: R101.1 U8.1 | length 1.7
  Bottom Layer w0.3: U8.1@26.82,19.21 28.515,19.21 R101.1@28.525,19.2
NetR102_1: R102.1 U8.3 | length 1.7
  Bottom Layer w0.3: U8.3@26.82,16.67 28.495,16.67 R102.1@28.525,16.7
NetR103_1: R103.1 U8.5 | length 1.7
  Bottom Layer w0.3: U8.5@26.82,14.13 28.495,14.13 R103.1@28.525,14.1
NetR104_1: R104.1 U8.7 | length 1.7
  Bottom Layer w0.3: U8.7@26.82,11.59 26.83,11.6 R104.1@28.525,11.6
NetR106_1: R106.1 R110.1 U8.16 | length 34.7
  GND Layer w0.3: v1(14.123,44.468) 19.389,44.468 22.3,41.558 22.3,19.673 21.852,19.225 v1(21.825,19.225)
  Bottom Layer w0.3: U8.16@20.6,19.21 20.608,19.218 21.818,19.218 v1(21.825,19.225)
  Bottom Layer w0.5: R110.1@13.375,44.475 R106.1@14.875,44.475
NetR107_1: R107.1 R111.1 U8.14 | length 39
  GND Layer w0.3: v1(14.123,45.918) 19.231,45.918 22.775,42.375 22.775,17.6 v1(21.825,16.65)
  Bottom Layer w0.3: U8.14@20.6,16.67 20.61,16.66 21.815,16.66 v1(21.825,16.65)
  Bottom Layer w0.5: R111.1@13.375,45.925 R107.1@14.875,45.925
NetR108_1: R108.1 R112.1 U8.12 | length 43.3
  GND Layer w0.3: v1(14.123,47.368) 19.133,47.368 23.275,43.227 23.275,15.575 v1(21.825,14.125)
  Bottom Layer w0.3: U8.12@20.605,14.125 v1(21.825,14.125)
  Bottom Layer w0.5: R112.1@13.375,47.375 R108.1@14.875,47.375
NetR109_1: R109.1 R113.1 U8.10 | length 47.5
  GND Layer w0.3: v1(14.123,48.818) 19.005,48.818 23.775,44.049 23.775,13.55 v1(21.825,11.6)
  Bottom Layer w0.3: U8.10@20.6,11.59 20.605,11.595 21.695,11.595 v1@21.7,11.6
  Bottom Layer w0.5: R113.1@13.375,48.825 R109.1@14.875,48.825
NetU3_4: U3.4 XP7.2 | length 6.8
  Top Layer w0.3: U3.4@153.525,47.275 153.525,49.225 152.875,49.875 152.875,52.375 XP7.2@153.875,53.375
NetU4_4: U4.4 XP7.4 | length 6.8
  Top Layer w0.3: U4.4@150.225,47.275 150.225,49.225 150.878,49.878 150.878,52.378 XP7.4@151.875,53.375
NetU5_4: U5.4 XP7.6 | length 7.3
  Top Layer w0.3: U5.4@146.925,47.275 146.925,48.725 148.875,50.675 148.875,52.375 XP7.6@149.875,53.375
NetVT1_3: VT1.3 XP6.2 | length 3
  Top Layer w0.3: XP6.2@123.371,2.257 XP6.2@123.396,2.282
  Top Layer w0.5: XP6.2@123.396,2.282 VT1.3@123.396,5.232
NRST: C19.1 DD1.14 XP3.5 | length 23.7
  Top Layer w0.3: C19.1@107.083,20.975 108.195,20.975 XP3.5@109.16,21.94 ; DD1.14@110.475,40.525 110.475,29.939 v1(110.487,29.928)
  Bottom Layer w0.3: XP3.5@109.16,21.94 110.553,23.333 111.508,23.333 111.875,23.7 111.875,25.457 112.3,25.882 112.3,28.114 v1(110.487,29.928)
OSC0: C21.1 DD1.12 ZQ2.1 | length 13.3
  Top Layer w0.3: DD1.12@111.475,40.525 111.475,41.375 115.975,45.875 115.975,49.099 115.799,49.275 ZQ2.1@114.875,49.275 114.775,49.375 C21.1@114.775,50.875
OSC1: C23.1 DD1.13 ZQ2.3 | length 8.4
  Top Layer w0.3: DD1.13@110.975,40.525 110.975,42.75 113.225,45 113.225,46.225 C23.1@113.15,46.3 ; ZQ2.3@113.175,47.975 113.225,47.925 C23.1@113.225,46.375
OSC32_0: C20.1 DD1.8 ZQ1.1 | length 10.5
  Top Layer w0.3: DD1.8@113.475,40.525 113.475,41.675 117.582,45.782 117.582,46.2 117.857,46.475 119.575,46.475 119.825,46.725 ZQ1.1@119.825,47.425
OSC32_1: C22.1 DD1.9 ZQ1.2 | length 15.7
  Top Layer w0.3: DD1.9@112.975,40.525 112.975,41.978 116.675,45.678 116.675,50.575 117.025,50.925 C22.1@117.875,50.925 119.525,50.925 119.825,50.625 ZQ1.2@119.825,49.925
PD1: C25A11.2 DA3A11.2 R14A11.1 XP1.1 | length 18.2
  Top Layer w0.5: DA3A11.2@52.75,49.105 52.775,49.13 52.775,52.3 C25A11.2@52.8,52.325 v1(52.8,53.65) 52.819,53.631 56.269,53.631 R14A11.1@56.525,53.375
  Bottom Layer w0.3: XP1.1@43.975,51.425 45.775,51.425 48,53.65 v1(52.8,53.65)
PD1_ADC: C30A11.1 DD1.25 R17A11.2 | length 64.7
  Top Layer w0.3: v1(48.45,36.645) v1@48.46,36.635 ; R17A11.2@50.815,36.635 R17A11.2@50.825,36.625 ; v1(103.35,41.15) 104.975,41.15 DD1.25@104.975,40.525
  Top Layer w0.5: v1@48.46,36.635 R17A11.2@50.815,36.635
  Bottom Layer w0.3: v1(48.45,36.645) 52.472,32.623 63.825,32.623 63.926,32.725 85.7,32.725 94.125,41.15 v1(103.35,41.15)
PD1_ERR: DA4A11.5 DD1.16 | length 68.8
  Top Layer w0.3: v1(54.825,36.725) 54.825,38.114 55.236,38.525 55.775,38.525 DA4A11.5@55.9,38.65 ; DD1.16@109.475,40.525 109.475,39.431 109.8,39.106 v1(109.8,39.025)
  Bottom Layer w0.3: v1(54.825,36.725) 59.625,41.525 81.693,41.525 85.993,45.825 108.016,45.825 109.25,44.591 109.25,42.612 109.8,42.062 v1(109.8,39.025)
PD2: C25A2.2 DA3A2.2 R14A2.1 XP1.3 | length 33.8
  Top Layer w0.5: DA3A2.2@65.466,49.105 65.466,52.266 C25A2.2@65.525,52.325 v1(65.525,53.65) 68.9,53.65 R14A2.1@69.225,53.325
  Bottom Layer w0.3: XP1.3@41.975,51.425 43.05,50.35 46.624,50.35 48.599,52.325 64.2,52.325 v1(65.525,53.65)
PD2_ADC: C30A2.1 DD1.24 R17A2.2 | length 52.4
  Top Layer w0.3: v1(103.35,41.975) 105.1,41.975 105.475,41.6 DD1.24@105.475,40.525
  Top Layer w0.5: v1(61.175,36.6) 62.05,36.6 C30A2.1@62.075,36.575 ; C30A2.1@62.05,36.625 R17A2.2@63.55,36.625
  Bottom Layer w0.3: v1(61.175,36.6) 63.925,33.85 85.5,33.85 93.625,41.975 v1(103.35,41.975)
PD2_ERR: DA4A2.5 DD1.17 | length 51.7
  Top Layer w0.3: v1(67.575,36.725) 67.575,38.095 68.005,38.525 68.733,38.525 DA4A2.5@68.883,38.675 ; v1(108.625,41.9) 108.625,41.819 108.975,41.469 DD1.17@108.975,40.525
  Bottom Layer w0.3: v1(67.575,36.725) 69.214,38.364 79.539,38.364 86.325,45.15 107.769,45.15 108.625,44.294 v1(108.625,41.9)
PD3: C25A1.2 DA3A1.2 R14A1.1 XP1.5 | length 49.1
  Top Layer w0.5: DA3A1.2@78.2,49.105 78.2,52.275 C25A1.2@78.25,52.325 v1(78.25,53.65) 78.269,53.631 81.694,53.631 R14A1.1@81.95,53.375
  Bottom Layer w0.3: XP1.5@39.975,51.425 41.775,49.625 47.85,49.625 49.395,51.17 67.72,51.17 70.2,53.65 v1(78.25,53.65)
PD3_ADC: C30A1.1 DD1.23 R17A1.2 | length 39.6
  Top Layer w0.3: v1(103.35,42.8) 105.256,42.8 105.975,42.081 DD1.23@105.975,40.525
  Top Layer w0.5: v1(73.9,36.6) C30A1.1@74.775,36.6 ; C30A1.1@74.775,36.625 R17A1.2@76.275,36.625
  Bottom Layer w0.3: v1(73.9,36.6) 74.825,35.675 81.575,35.675 83.455,37.555 87.98,37.555 93.225,42.8 v1(103.35,42.8)
PD3_ERR: DA4A1.5 DD1.18 | length 39.2
  Top Layer w0.3: v1(80.325,36.725) 80.325,38.12 80.73,38.525 81.343,38.525 DA4A1.5@81.492,38.675 ; DD1.18@108.475,40.525 108.475,39.45 v1(108.9,39.025)
  Bottom Layer w0.3: v1(80.325,36.725) 88.05,44.45 103.45,44.45 104.369,43.531 104.369,42.281 106.125,40.525 107.4,40.525 v1(108.9,39.025)
PMO_HW: DA21.1 R119.2 XP9.13 | length 14.5
  Top Layer w0.3: XP9.13@3.6,26.5 12.2,26.5 12.684,26.016 12.684,25.621 R119.2@12.955,25.35 ; DA21.1@12.758,21.5 12.883,21.625 12.883,22.372 13.635,23.124 13.635,24.62 R119.2@12.955,25.3
POWER_IND: DD1.1 R53.2 | length 40.2
  Top Layer w0.3: DD1.1@116.975,40.525 116.975,41.224 117.151,41.4 134.1,41.4 139.7,35.8 151.075,35.8 152.6,37.325 R53.2@153.475,37.325
PS_A: DD1.96 DD3.3 | length 42.8
  Top Layer w0.3: DD1.96@118.5,37 v1(122.225,37)
  Top Layer w0.5: v1(150.675,18.3) 150.678,18.303 150.678,19.697 DD3.3@150.681,19.7
  GND Layer w0.5: v1(122.225,37) 122.225,35.424 124.624,33.025 136.912,33.025 150.675,19.262 v1(150.675,18.3)
PS_D: DD1.95 DD3.2 | length 43.2
  Top Layer w0.3: DD1.95@118.5,36.5 120.2,36.5 120.525,36.175 v1(123.075,36.175)
  Top Layer w0.5: DD3.2@151.981,19.7 151.991,19.691 151.991,18.309 v1(152,18.3)
  GND Layer w0.5: v1(123.075,36.175) 125.075,34.175 137.365,34.175 152,19.54 v1(152,18.3)
PS_ERR1: DD1.66 DD5.14 | length 29.2
  Top Layer w0.3: v1(112.475,24.2) DD1.66@112.475,25.475 ; v1(136.817,22) 136.819,21.998 136.819,20.012 DD5.14@136.821,20.01
  GND Layer w0.3: v1(112.475,24.2) 113.25,24.975 133.842,24.975 v1(136.817,22)
PS_ERR2: DD1.67 DD5.13 | length 30.6
  Top Layer w0.3: v1(112.954,26.85) 112.975,26.829 DD1.67@112.975,25.475 ; v1(138.087,22) 138.089,21.998 138.089,20.012 DD5.13@138.091,20.01
  GND Layer w0.3: v1(112.954,26.85) 112.954,26.769 114.034,25.688 134.399,25.688 v1(138.087,22)
PS_ERR3: DD1.68 DD5.12 | length 32.4
  Top Layer w0.3: DD1.68@113.475,25.475 113.475,26.4 113.625,26.55 v1(113.625,27.25) ; DD5.12@139.361,20.01 v1(139.361,22)
  GND Layer w0.3: v1(113.625,27.25) 114.375,28 133.361,28 v1(139.361,22)
PS_ON: DD1.69 DD5.11 | length 31.3
  Top Layer w0.3: DD1.69@113.975,25.475 113.975,24.456 114.15,24.281 v1(114.15,24.2) ; DD5.11@140.631,20.01 v1(140.631,22)
  GND Layer w0.3: v1(114.15,24.2) 131.775,24.2 134.706,21.269 139.9,21.269 v1(140.631,22)
RD_N: DA17.4 R60.1 R63.2 XS1.6 | length 35.9
  Top Layer w0.3: R63.2@181.275,40.525 181.275,40.575 181.698,40.998 182.379,40.998 183.729,42.347 184.635,42.347 185.25,41.732 185.25,40.806 185.19,40.746 185.19,39.394 185.35,39.234 185.35,38.281 184.806,37.737 184.558,37.737 184.382,37.913 184.382,38.575 XS1.6@184.2,38.757
  Top Layer w0.381: R60.1@181.275,39.025 R63.2@181.275,40.525
  Bottom Layer w0.3: DA17.4@182.15,26.275 182.275,26.15 182.772,26.15 182.948,25.974 182.948,25.346 183.448,24.846 185.646,24.846 187.4,26.6 187.4,30.217 188.892,31.708 188.892,31.762 189.035,31.905 189.035,37.167 188.437,37.764 187.948,37.764 186.955,38.757 XS1.6@184.2,38.757
RD_P: DA17.3 R61.1 R66.2 XS1.4 | length 35
  Top Layer w0.3: R61.1@181.275,43.525 R66.2@181.275,42.025 181.275,41.975 181.698,41.552 182.15,41.552 183.499,42.901 184.864,42.901 185.804,41.962 185.804,40.576 185.69,40.462 185.69,39.601 185.85,39.441 185.85,38.074 185.013,37.237 184.558,37.237 184.382,37.062 184.382,36.4 XS1.4@184.2,36.217
  Bottom Layer w0.3: XS1.4@184.2,36.217 186.955,36.217 187.986,37.249 188.223,37.249 188.519,36.953 188.519,32.119 186.846,30.446 186.846,26.829 185.417,25.4 183.678,25.4 183.502,25.576 183.502,25.974 183.678,26.15 184.175,26.15 DA17.3@184.3,26.275
RE/DE: DD1.51 DD10.4 DD10.5 | length 83.2
  Top Layer w0.3: v1(102.925,25.925) 104.975,25.925 DD1.51@104.975,25.475
  Top Layer w0.6: DD10.4@28.6,37.52 28.6,38.15 DD10.5@28.6,38.79
  Top Layer w0.7: 28.6,38.15 v1(30.2,38.15)
  Power Layer w0.3: v1(30.2,38.15) 41.163,38.15 50.038,29.275 98.525,29.275 101.875,25.925 v1(102.925,25.925)
RS485A_HW: DD10.12 R84.1 XP9.5 | length 17.5
  Top Layer w0.3: v1(8.331,37.262) 12.912,37.262 14.8,39.15 R84.1@16.025,39.15 16.385,38.79 DD10.12@19,38.79
  Bottom Layer w0.3: XP9.5@3.6,34.5 4.75,34.5 7.512,37.262 v1(8.331,37.262)
RS485B_HW: DD10.13 R84.2 XP9.6 | length 19.5
  Top Layer w0.3: v1(8.35,36.425) 13.296,36.425 14.021,37.15 R84.2@16.025,37.15 16.395,37.52 DD10.13@19,37.52
  Bottom Layer w0.3: XP9.6@1.6,34.5 2.6,33.5 4.704,33.5 7.629,36.425 v1(8.35,36.425)
Rx485: DD1.48 DD10.3 | length 83.9
  Top Layer w0.3: v1(27,36.25) DD10.3@28.6,36.25 ; v1(101.5,27.6) 101.9,28 DD1.48@103.45,28
  Power Layer w0.3: v1(27,36.25) 27.057,36.307 27.292,36.307 29.77,38.785 41.164,38.785 50.224,29.725 99.375,29.725 v1(101.5,27.6)
RxCAN: DD1.70 DD6.5 | length 30.5
  Top Layer w0.3: v1(114.3,26.85) 114.3,26.769 114.475,26.594 DD1.70@114.475,25.475
  Bottom Layer w0.3: v1(114.3,26.85) 114.3,26.8 116.812,24.288 137.074,24.288 138.731,22.63 138.731,21.668 139.211,21.188 139.211,20.16 DD6.5@139.361,20.01
RXI_N: DD9.5 R63.1 | length 9.4
  Top Layer w0.3: DD9.5@173.3,36.7 175.031,36.7 176.8,38.469 176.8,40.293 177.465,40.958 178.243,40.958 178.675,40.525 R63.1@179.725,40.525
RXI_P: DD9.6 R66.1 | length 9.5
  Top Layer w0.3: DD9.6@173.3,37.2 174.824,37.2 176.3,38.676 176.3,40.5 177.257,41.458 178.258,41.458 178.825,42.025 R66.1@179.725,42.025
SWCLK: DD1.76 XP3.2 | length 11.3
  Top Layer w0.3: XP3.2@114.24,19.4 117.025,19.4 118.9,21.275 118.9,24.378 118.5,24.778 DD1.76@118.5,27
SWDIO: DD1.72 XP3.4 | length 8.3
  Top Layer w0.3: XP3.4@111.7,19.4 113,20.7 113,22.996 113.494,23.49 114.59,23.49 115.475,24.375 DD1.72@115.475,25.475
T1: R20A3.2 R21A3.1 XP1.7 | length 5.4
  Top Layer w0.5: XP1.7@37.975,51.425 37.975,50.35 39.128,49.197 R21A3.1@39.128,47.972 39.103,47.947 39.103,46.597 R20A3.2@39.078,46.572
T1_ADC: C34A3.1 DD1.26 R21A3.2 | length 74
  Top Layer w0.3: v1(101.5,39) DD1.26@103.45,39
  Top Layer w0.5: v1(37.578,48.997) R21A3.2@37.578,47.972 37.603,47.947 37.603,46.597 C34A3.1@37.628,46.572
  GND Layer w0.3: v1@37.65,49 37.65,46.275 42.125,41.8 98.7,41.8 v1(101.5,39)
T2: R20A4.2 R21A4.1 XP1.9 | length 5
  Top Layer w0.5: XP1.9@35.975,51.425 35.975,51.181 36.225,50.931 36.225,46.625 R20A4.2@36.175,46.575
T2_ADC: C34A4.1 DD1.29 R21A4.2 | length 77.2
  Top Layer w0.3: v1(101.5,37.5) DD1.29@103.45,37.5
  Top Layer w0.5: v1(34.675,49) R21A4.2@34.675,47.975 34.725,47.925 C34A4.1@34.725,46.575
  GND Layer w0.3: v1(34.675,49) 34.675,46.925 40.575,41.025 98,41.025 101.5,37.525 v1(101.5,37.5)
TD_N: DA17.6 R58.1 R62.2 XS1.3 | length 25.1
  Top Layer w0.3: R62.2@181.275,32.507 181.454,32.507 181.698,32.751 182.197,32.751 182.5,32.447 182.5,31.599 183.554,30.546 188.046,30.546 189,31.5 189,33.183 188.229,33.954 187.125,33.954 186.949,34.13 186.949,34.738 XS1.3@186.74,34.947
  Top Layer w0.381: R58.1@181.275,30.778 R62.2@181.275,32.277
  Bottom Layer w0.3: DA17.6@182.15,28.175 182.275,28.3 182.772,28.3 182.948,28.476 182.948,29.331 185.25,31.633 185.25,32.812 186.531,34.093 186.531,34.738 XS1.3@186.74,34.947
TD_P: DA17.1 R59.1 R65.2 XS1.1 | length 20.6
  Top Layer w0.3: R65.2@181.275,33.778 181.275,33.728 181.698,33.305 182.426,33.305 183.054,32.676 183.054,31.829 183.783,31.1 187.817,31.1 188.446,31.729 188.446,32.954 188,33.4 187.447,33.4 187.271,33.225 187.271,32.939 XS1.1@186.74,32.407
  Top Layer w0.381: R65.2@181.275,33.778 R59.1@181.275,35.278
  Bottom Layer w0.3: DA17.1@184.3,28.175 184.175,28.3 183.678,28.3 183.502,28.476 183.502,29.102 185.804,31.404 185.804,31.682 185.98,31.857 186.19,31.857 XS1.1@186.74,32.407
Tx485: DD1.47 DD10.6 | length 82.8
  Top Layer w0.3: v1(27,40.05) 27.005,40.055 28.595,40.055 DD10.6@28.6,40.06 ; v1(101.5,28.5) 102.737,28.5 DD1.47@103.45,28.5
  Power Layer w0.3: v1(27,40.05) 27.675,39.375 41.211,39.375 50.411,30.175 99.825,30.175 v1(101.5,28.5)
TxCAN: DD1.71 DD6.6 | length 31
  Top Layer w0.3: DD1.71@114.975,25.475 114.975,26.544 115.2,26.769 v1(115.2,26.85)
  Bottom Layer w0.3: v1(115.2,26.85) 115.2,26.8 117.262,24.738 137.987,24.738 140.006,22.719 140.006,21.753 140.481,21.278 140.481,20.16 DD6.6@140.631,20.01
TXO_N: DD9.2 R62.1 | length 9.4
  Top Layer w0.3: DD9.2@173.3,35.2 174.827,35.2 174.838,35.2 175.042,34.996 175.114,34.924 ; 175.115,34.923 ccw(c175.681,35.488) 176.247,34.923 176.437,35.112 cw(c176.631,34.918) 176.826,35.112 cw(c176.631,34.918) 176.826,34.723 176.636,34.534 ccw(c177.202,33.968) 176.636,33.402 177.033,33.005 177.338,32.7 177.44,32.7 178.2,32.7 178.623,32.277 R62.1@179.725,32.277
TXO_P: DD9.3 R65.1 | length 9.5
  Top Layer w0.3: DD9.3@173.3,35.7 175.045,35.7 175.186,35.559 175.396,35.349 175.469,35.276 ccw(c175.681,35.488) 175.893,35.276 176.083,35.466 cw(c176.631,34.918) 177.179,35.466 cw(c176.631,34.918) 177.181,34.371 176.989,34.18 ccw(c177.202,33.968) 176.989,33.756 177.387,33.359 177.545,33.2 177.94,33.2 178.2,33.2 178.778,33.778 R65.1@179.725,33.778
XSCI: DD9.12 R69.2 R71.1 | length 11
  Top Layer w0.3: R71.1@169.3,47.2 169.3,45.5 169.9,44.9 R69.2@171.025,44.9 171.149,44.776 171.149,44.151 171.5,43.8 172.934,43.8 173.9,42.834 173.9,40.2 DD9.12@173.3,40.2
XSCO: C82.1 DD9.11 R69.1 ZQ3.1 | length 11.4
  Top Layer w0.3: DD9.11@173.3,39.7 174.345,39.7 174.665,40.02 174.665,43.535 173.3,44.9 R69.1@172.575,44.9 172.575,46.575 ZQ3.1@172.7,46.7 172.7,46.75 173.15,47.2 C82.1@174.375,47.2
pads on no net: DA1.3 DA1.5 DA2.4 DA3A1.5 DA3A2.5 DA3A11.5 DA19.3 DA19.5 DA19.8 DD1.83 DD1.84 DD1.85 DD1.86 DD1.87 DD1.97 DD1.98 DD4.1 DD6.1 DD6.4 DD6.10 DD6.14 DD6.15 DD8.1 DD9.18 DD9.19 DD9.21 DD9.34 DD9.35 DD9.37 DD9.38 DD9.39 DD9.40 DD9.41 DD9.42 DD9.43 DD9.44 DD10.10 DD10.11 DD10.14 DD11.7 XP3.6 XP7.7 XP7.8 XS1. XS1.7 XS1.8

## Polygon pours and split planes (outlines as drawn)
GND on Top Layer "GND_L01_P006" (solid, remove dead copper, pour order 6): 190.825,15.875 190.825,22.125 193.2,24.5 200,24.5 200,45.497 193,45.497 190.5,47.997 190.5,54.997 158.75,54.997 158.75,42.5 143,42.5 143,55 104.375,55 104.375,48.375 102,46 97.875,46 95.5,48.375 95.5,55 90.625,55 90.625,22.309 95.5,17.434 32,17.434 32,55 25.5,55 25.5,9.3 32,9.3 32,17.434 95.5,17.434 104.375,8.559 104.375,0 128.5,0 128.5,14 132.5,18 152,18 159.925,18 164.175,13.75 181.425,13.75 183.55,15.875
GND_DRVA7 on Top Layer "GND_DRVA7_L01_P002" (solid, remove dead copper, pour order 2): 39.75,15.5 36.322,12.072 36.322,0 59.5,0 59.5,15.5
AGND on Top Layer "AGND_L01_P017" (solid, remove dead copper, pour order 17): 34,55 34,22.275 38.275,18 88.375,18 88.375,55
GND_DRVA6 on Top Layer "GND_DRVA6_L01_P000" (solid, remove dead copper, pour order 0): 66.875,15.5 66.875,0 89.25,0 89.25,15.5
GND_HW on Top Layer "GND_HW_L01_P008" (solid, remove dead copper, pour order 8): 9,0 9,6.5 6.5,9 0,9 0,46 6,46 9,49 9,55 22,55 22,7.545 17.55,3.095 17.55,0
AGND_HW on Top Layer "NONET_L-01_P-001" (solid, pour order 21): 12.566,29.195 12.566,27.056 13.496,26.126 16.874,26.126 16.874,24.87 18.098,24.87 18.098,26.126 19.253,27.28 19.253,29.195
GND_PS on Top Layer "GND_PS_L01_P013" (solid, remove dead copper, pour order 13): 131.125,0 131.125,13.25 133.375,15.5 155.081,15.5 155.081,0
GND_FS on Top Layer "NONET_L-01_P-001" (solid, remove dead copper, pour order 20): 164.175,11 162.5,9.325 162.5,0 174.25,0 174.25,11
GND_DRVA6 on Bottom Layer "GND_DRVA6_L04_P001" (solid, remove dead copper, pour order 1): 66.875,15.5 66.875,0.003 89.25,0.003 89.25,15.5
GND on Bottom Layer "GND_L04_P009" (solid, remove dead copper, pour order 9): 200,24.5 193.2,24.5 190.61,21.91 180.053,21.91 174.25,16.107 174.25,13.75 164.175,13.75 159.925,18 132.5,18 128.5,14 128.5,0 104.4,0 104.4,8.6 99.5,13.5 95,18 38.374,18 33,12.626 33,9.3 25.5,9.3 25.5,19 25.5,55 32,55 32,26.5 82.5,26.5 90.625,34.625 90.625,55 95.5,55 95.5,48.375 97.877,45.998 101.998,45.998 104.375,48.375 104.375,55 143,55 143,42.5 158.75,42.5 158.75,55 190.5,55 190.5,49 193.502,45.998 200,45.998
GND_HW on Bottom Layer "GND_HW_L04_P015" (solid, remove dead copper, pour order 15): 9,0 9,6.5 6.5,9 0,9 0,46 6,46 9,49 9,55 22,55 22,8.75 18.788,8.75 17.55,7.512 17.55,0
GND_DRVA7 on Bottom Layer "GND_DRVA7_L04_P003" (solid, remove dead copper, pour order 3): 39.75,15.5 36.325,12.075 36.325,0 59.503,0 59.503,15.5
GND_FS on Bottom Layer "NONET_L-01_P-001" (solid, remove dead copper, pour order 19): 164.175,11 162.5,9.325 162.5,0 174.25,0 174.25,11
GND_PS on Bottom Layer "GND_PS_L04_P012" (solid, remove dead copper, pour order 12): 131.125,0 131.125,13.25 133.375,15.5 155.081,15.5 155.081,0
AGND on Bottom Layer "AGND_L04_P005" (solid, remove dead copper, pour order 5): 34,55 34,28.5 52.499,28.5 73.5,28.5 82.25,28.5 88.375,34.625 88.375,55
GND on GND Layer "GND_L03_P018" (solid, remove dead copper, pour order 18): 25.5,55 32,55 32,26.5 82.5,26.5 90.626,34.626 90.626,55 95.5,55 95.5,48.375 97.877,45.998 101.998,45.998 104.375,48.375 104.375,55 143,55 143,42.497 158.75,42.497 158.75,55 190.5,55 190.5,49 193.502,45.998 200,45.998 200,24.5 193.175,24.5 190.825,22.15 190.825,15.875 183.55,15.875 181.425,13.75 164.175,13.75 159.925,18 132.5,18 128.5,14 128.5,0 104.4,0 104.4,8.6 95,18 38.51,18 31.6,11.09 31.6,9.3 25.5,9.3
GND_HW on GND Layer "GND_HW_L03_P016" (solid, remove dead copper, pour order 16): 9,0 9,6.5 6.5,9 0,9 0,46 6,46 9,49 9,55 22,55 22,7.55 17.55,3.1 17.55,0
AGND on GND Layer "AGND_L03_P004" (solid, remove dead copper, pour order 4): 34,55 34,28.5 82.25,28.5 88.375,34.625 88.375,55

## Keep-outs
Top Layer:
  lines w0.2: 155.861,26.65 156.2,26.311 159.305,26.311 159.656,26.662 159.656,27.951 159.294,28.312 156.211,28.312 155.861,27.962 155.861,26.65 ; 155.871,18.389 156.21,18.05 159.315,18.05 159.674,18.409 159.674,19.681 159.304,20.051 156.221,20.051 155.871,19.701 155.871,18.389
GND Layer:
  lines w0.2: 154.8,42.775 154.8,27.711 156.23,26.281 159.274,26.281 159.656,26.662 159.656,27.944 157.1,30.5 157.1,42.915 ; 155.871,17.874 155.871,19.701 156.221,20.051 159.304,20.051 159.674,19.681 159.674,17.874
Bottom Layer:
  lines w0.2: 155.871,17.874 155.871,27.973 156.211,28.312 159.287,28.312 159.675,27.925 159.675,17.874

## Other copper
Top Layer:
  pour cut-out: 184.725,21 184.112,20.387 184.112,19.363 184.682,18.793 185.768,18.793 186.35,19.375 186.35,20.375 185.725,21
  pour cut-out: 13.075,3.7 12.462,3.087 12.462,2.063 13.075,1.45 14.075,1.45 14.7,2.075 14.7,3.075 14.075,3.7
GND Layer:
  pour cut-out: 99.5,11.125 99.5,13.5 128.75,13.5 128.75,11.125
  pour cut-out: 184.725,21 184.1,20.375 184.1,19.375 184.725,18.75 185.725,18.75 186.35,19.375 186.35,20.375 185.725,21
  pour cut-out: 13.075,3.7 12.45,3.075 12.45,2.075 13.075,1.45 14.075,1.45 14.7,2.075 14.7,3.075 14.075,3.7
Bottom Layer:
  pour cut-out: 13.075,3.7 12.45,3.075 12.45,2.075 13.075,1.45 14.075,1.45 14.7,2.075 14.7,3.075 14.075,3.7

## Silkscreen, mask and mechanical layers (free items; w line width, h text height)
Top Overlay:
  drawing of 15 lines, arcs and shapes, not listed
  text "SCALE" at 56.474,47.439 h1.3
  text "SCALE" at 69.337,47.439 h1.3
  text "SCALE" at 82.211,47.439 h1.3
  text "OVERPOW" at 52.756,28.641 h1.3
  text "OVERPOW" at 65.481,28.641 h1.3
  text "OVERPOW" at 78.306,28.616 h1.3
  text "Low-profile laser / Control board / Rev.3" at 135.35,23.95 h3
Top Assy:
  circle w0.2: c100,50 r1.6
  circle w0.2: c100,5 r1.6
  circle w0.2: c5,50 r1.6
  circle w0.2: c195,50 r1.6
  circle w0.2: c195,5 r1.6
  circle w0.2: c5,5 r1.6
Bottom Assy:
  circle w0.2: c100,50 r1.6
  circle w0.2: c100,5 r1.6
  circle w0.2: c5,50 r1.6
  circle w0.2: c195,50 r1.6
  circle w0.2: c195,5 r1.6
  circle w0.2: c5,5 r1.6
Board Outline:
  the board outline again, w0.2